# Altium PCB e3rev1.PcbDoc (part 2 of 2)
Units mm, origin at the board's own origin, x right, y up, seen from the top; angles counter-clockwise.
Board outline 75 x 45 mm, 4 copper layers (Top Layer, Int1 (GND), Int2 (PWR), Bottom Layer), stack 1.57 mm thick; 59 components, 45 nets, 232 pads, 75 vias.
Unrouted connection lines stored in the file: 32.
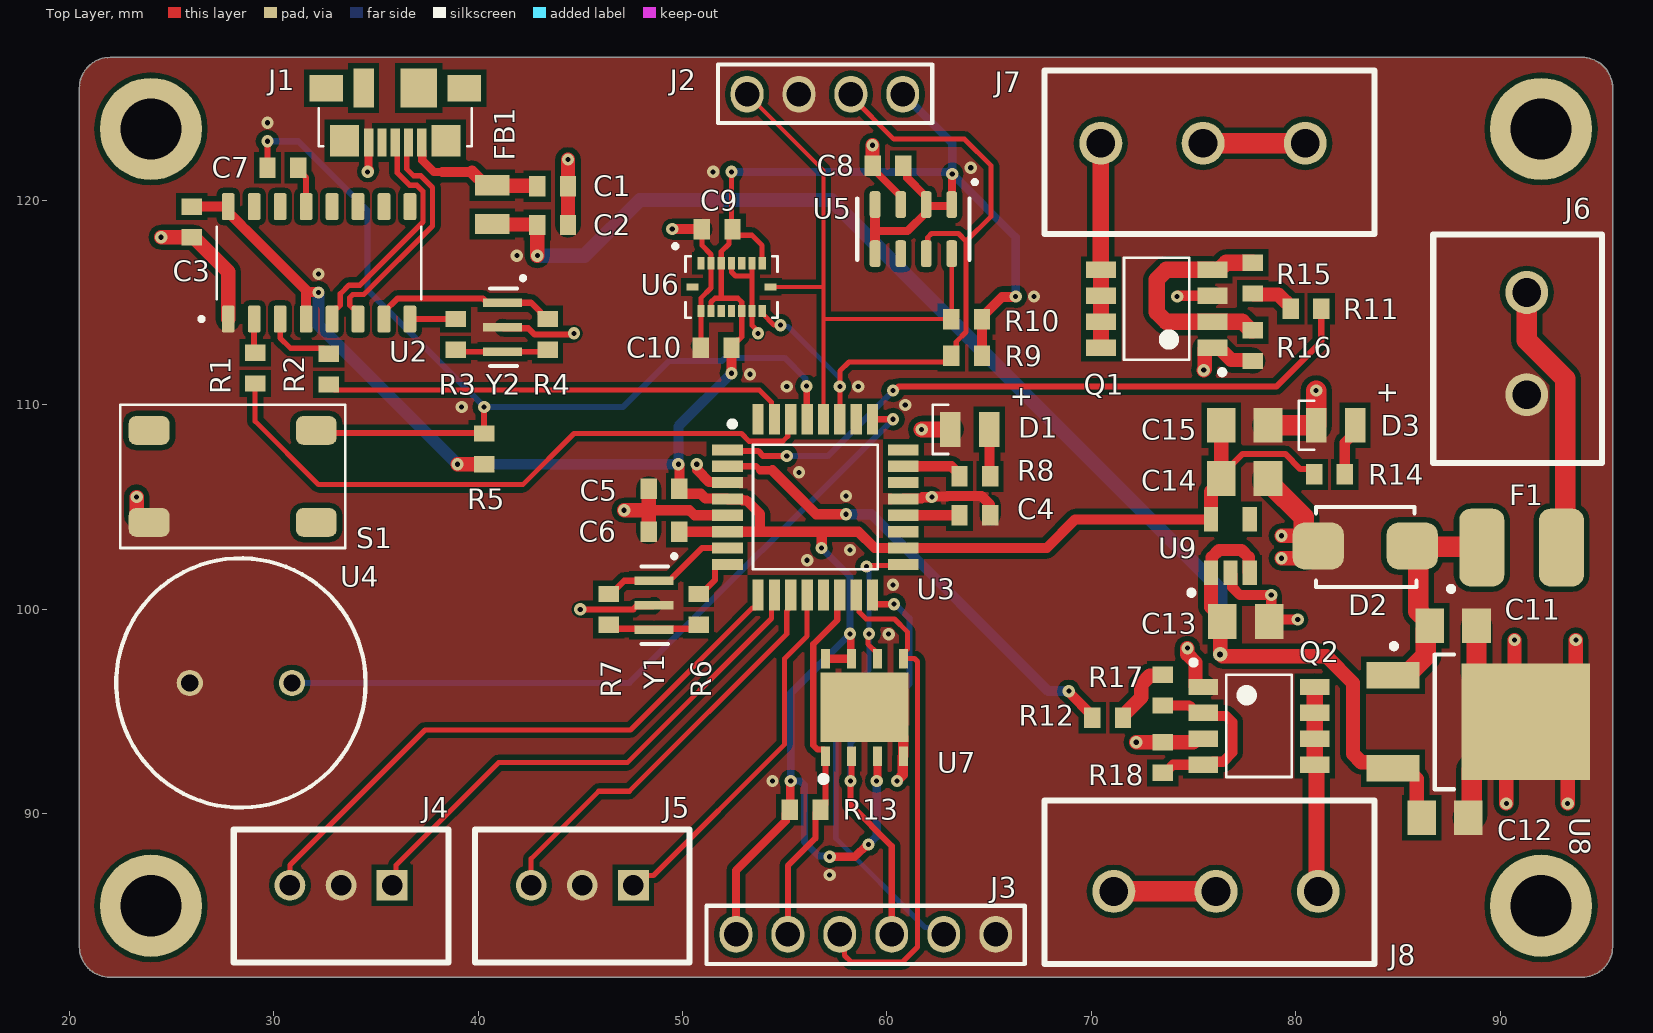
[diagram p0: Top Layer view]

## Via types
v1: diameter 0.6, hole 0.25, Top Layer to Bottom Layer, 74 vias
v2: diameter 0.7, hole 0.3, Top Layer to Bottom Layer, 1 vias

## Nets (pads, with @x,y where several pads share a name; then routed paths per layer and width w, separated by ;. In a path a pad name is that pad's centre, name@x,y a point inside that pad or via, vN(x,y) a via of type N, cw(c..) or ccw(c..) an arc to the next point about the centre after c; other vN are vias at no path point) (continued)
NetQ1_2: (continued)
  Top Layer w0.8: Q1.4@75.365,116.604 73.669,116.604 73.2,116.136 73.2,114.534 73.669,114.065 Q1.2 77.385,114.065 77.8,113.65 R16.2 ; Q1.4@75.366,116.605 Q1.4@75.924,116.605 ; Q1.4@76.25,116.605 76.595,116.95 R15.2
NetQ2_2: Q2.2 Q2.4 R17.2 R18.2 | length 9
  Top Layer w0.5: R18.2 73.6,92 73.995,92.395 75.8,92.395 75.95,92.545 76.445,92.545 76.9,93 76.9,94.492 76.607,94.785 75.625,94.785 Q2.2 75.15,94.935 74.785,95.3 R17.2
NetR1_1: R1.1 U2.2 | length 1.7
  Top Layer w0.3: U2.2 29.05,112.6 R1.1
NetR2_1: R2.1 U2.3 | length 3.6
  Top Layer w0.26: U2.3 30.32,113.28 30.83,112.77 32.43,112.77 R2.1
NetR6_1: R6.1 R7.1 Y1.3 | length 4.6
  Top Layer w0.3: R7.1 46.6,99.05 48.55,99.05 Y1.3 48.65,99.05 50.6,99.05 R6.1
NetR11_1: R11.1 U3.1 | length 33.1
  Top Layer w0.3: U3.1 52.25,107.75 53.7,107.75 53.95,107.5 v1(55.1,107.5) ; v1(60.3,110.7) 60.381,110.7 60.581,110.9 79.049,110.9 81.25,113.101 R11.1
  Bottom Layer w0.3: v1(55.1,107.5) 57.1,107.5 v1(60.3,110.7)
NetR12_1: R12.1 U3.2 | length 23
  Top Layer w0.3: U3.2 53.6,107 53.8,106.8
  Top Layer w0.4: 53.8,106.8 54.4,106.8
  Top Layer w0.5: 54.4,106.8 56.55,104.65 v1(58,104.65) ; v1(68.9,96) 68.919,95.981 68.919,95.931 70.05,94.8 R12.1
  Bottom Layer w0.5: v1(58,104.65) 59.25,104.65 67.9,96 v1(68.9,96)
USB_D_N: J1.2 U2.6 | length 11.6
  Top Layer w0.26: U2.6 34.13,114.545 33.95,114.725 33.879,114.725 33.727,114.877 33.727,115.245 33.879,115.398 34.409,115.398 37.773,118.762 37.773,120.638 37.209,121.202 36.856,121.202 36.507,121.551 36.507,122.747 J1.2
USB_D_P: J1.3 U2.5 | length 11.6
  Top Layer w0.26: U2.5 32.86,114.545 33.04,114.725 33.111,114.725 33.263,114.877 33.263,115.437 33.687,115.861 34.217,115.861 37.31,118.954 37.31,120.446 37.017,120.739 36.664,120.739 36.043,121.36 36.043,122.747 J1.3
pads on no net: J1.4 J1.S1 J1.S2 J1.S3 J1.S4 J1.S5 J1.S6 S1.1 S1.4 U2.9 U2.10 U2.11 U2.12 U2.14 U2.15 U3.13 U3.19 U3.22 U3.24 U3.26 U3.32 U5.6 U6.1 U6.5 U6.12 U6.13 U6.16 U9.4

## Polygon pours and split planes (outlines as drawn)
GND on Int2 (PWR) "GND_L03_P000" (solid, pour order 0): 20.5,83.5 20.5,125.5 cw(c22,125.5) 22,127 94,127 cw(c94,125.5) 95.5,125.5 95.5,83.5 cw(c94,83.5) 94,82 22,82 cw(c22,83.5)
GND on Int1 (GND) "GND_L02_P001" (solid, pour order 1): 20.5,83.5 20.5,125.5 cw(c22,125.5) 22,127 94,127 cw(c94,125.5) 95.5,125.5 95.5,83.5 cw(c94,83.5) 94,82 22,82 cw(c22,83.5)
GND on Bottom Layer "GND_L04_P003" (solid, pour order 3): 20.5,83.5 20.5,125.5 cw(c22,125.5) 22,127 94,127 cw(c94,125.5) 95.5,125.5 95.5,83.5 cw(c94,83.5) 94,82 22,82 cw(c22,83.5)
GND on Top Layer "GND_L01_P006" (solid, remove dead copper, pour order 6): 20.5,83.5 20.5,125.5 cw(c22,125.5) 22,127 94,127 cw(c94,125.5) 95.5,125.5 95.5,83.5 cw(c94,83.5) 94,82 22,82 cw(c22,83.5)

## Silkscreen, mask and mechanical layers (free items; w line width, h text height)
Mechanical 1:
  the board outline again, w0.127

## Text inside footprints (layer, text, board x,y; h text height)
D1: Top Overlay "+" at 66.003,109.951 h1
D3: Top Overlay "+" at 83.903,110.151 h1